# Altium PCB JUNORPCDC.PcbDoc (part 4 of 4)
Units mil, origin at the board's own origin, x right, y up, seen from the top; angles counter-clockwise.
Board outline 12224.75 x 6712.94 mil, 12 copper layers (Top Layer, Internal Plane 1, Signal Layer 1, Internal Plane 2, Internal Plane 3, Signal Layer 2, Internal Plane 4, Signal Layer 3, Internal Plane 5, Signal Layer 4, Internal Plane 6, Bottom Layer), stack 101.97 mil thick; 156 components, 400 nets, 1963 pads, 846 vias.
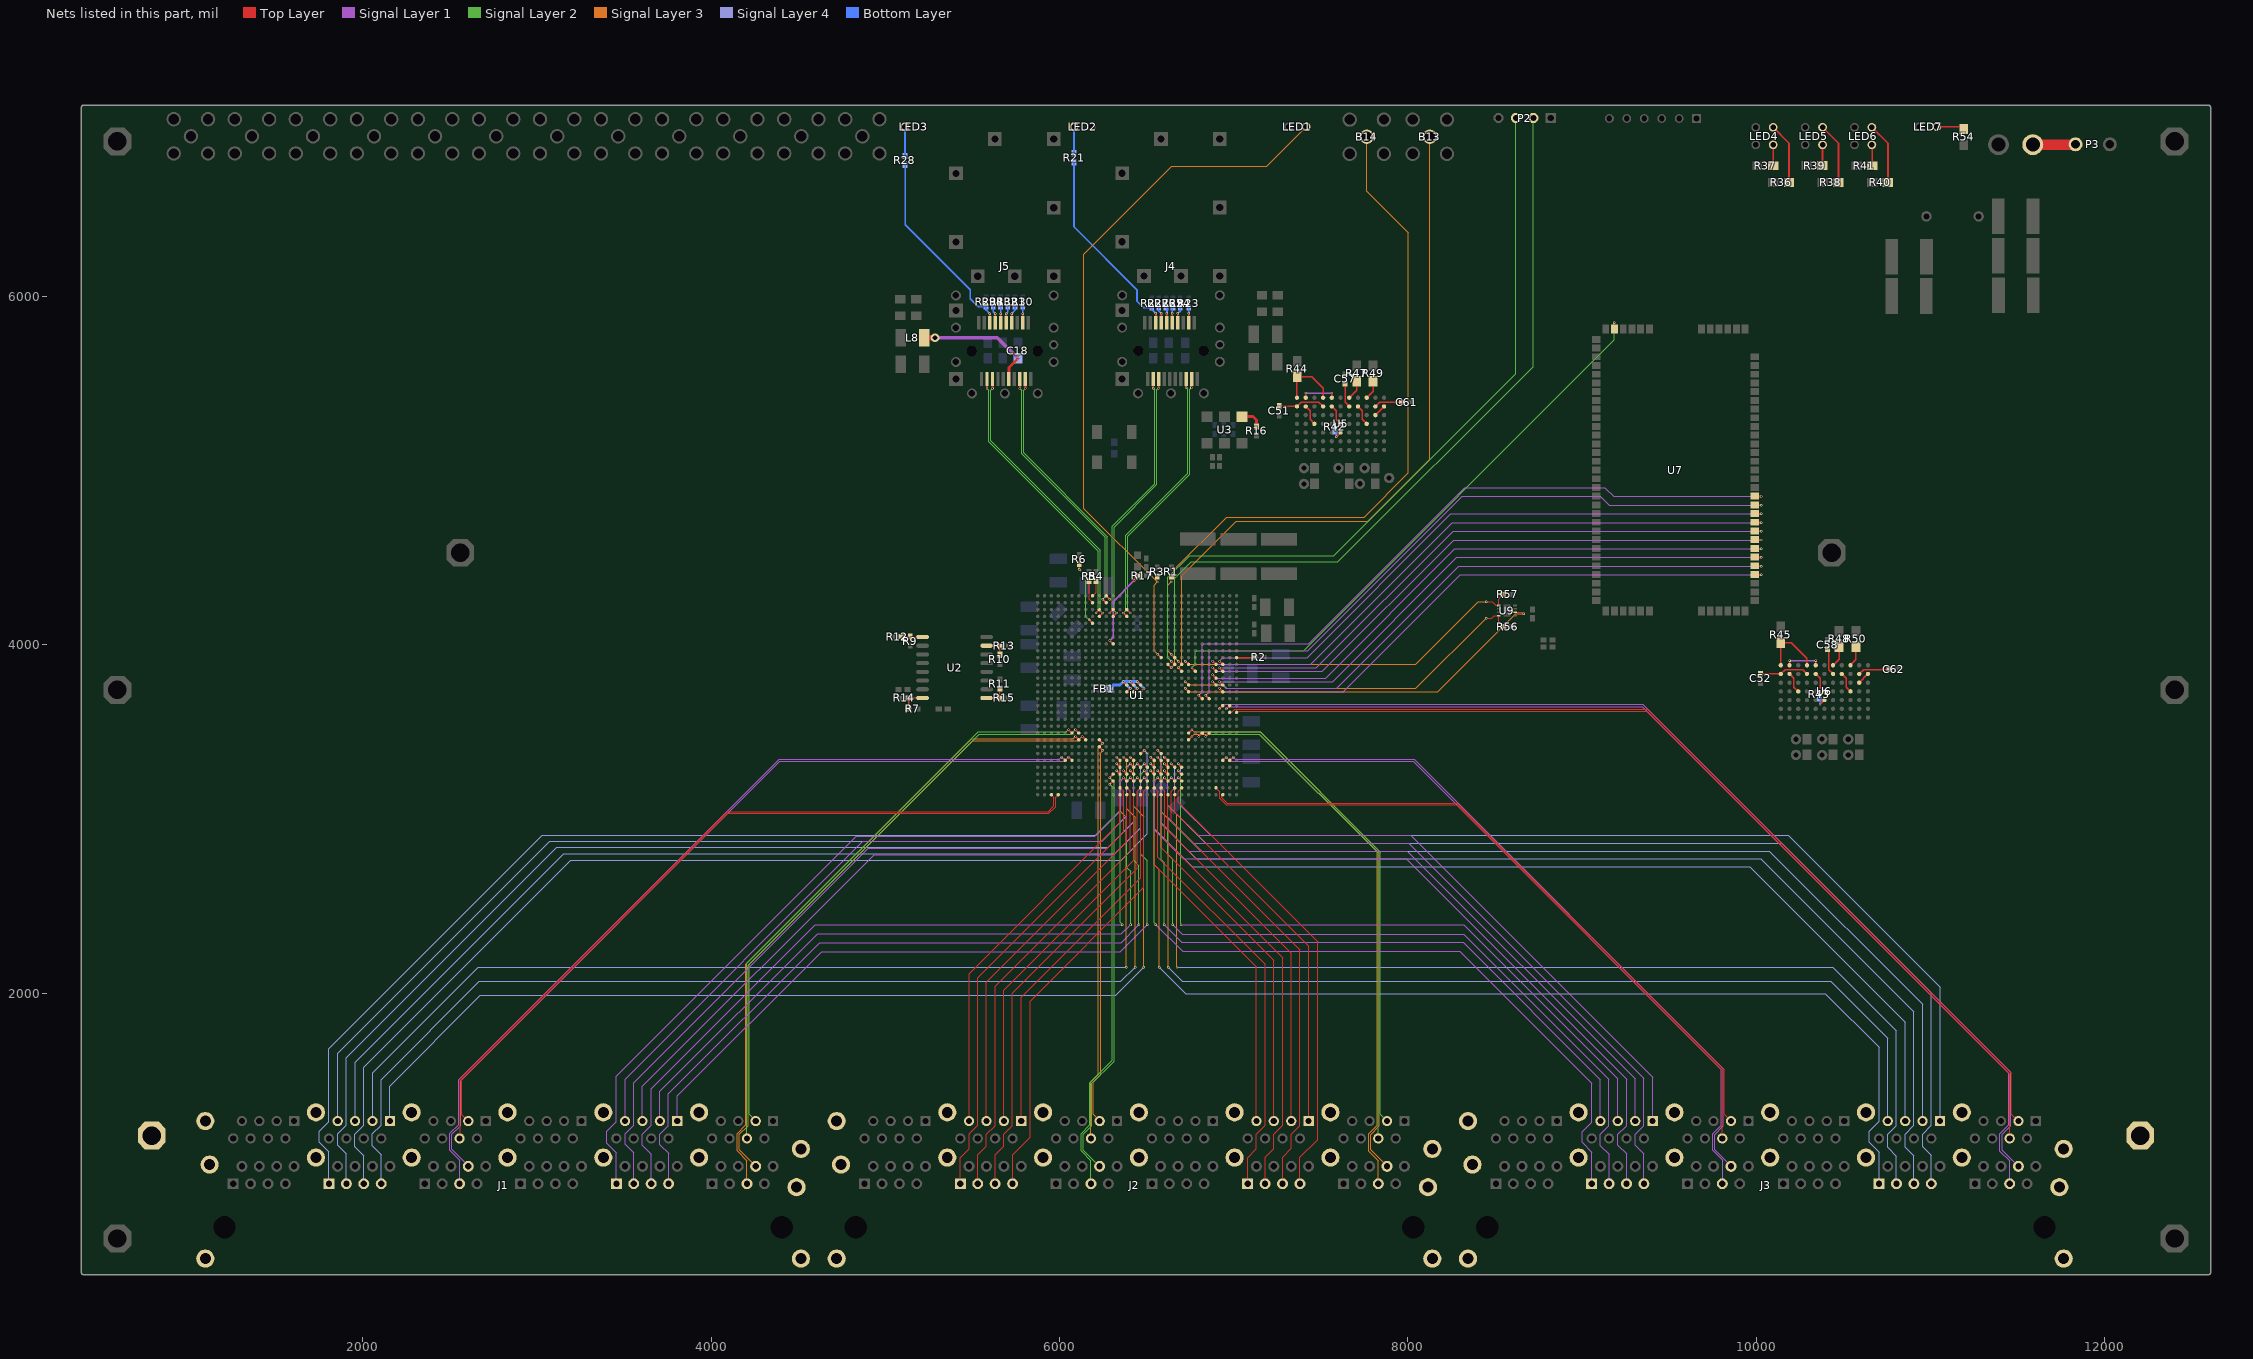
[diagram p14: the nets of this part, all layers, seen from the top]

## Via types
v1: diameter 14, hole 8, Top Layer to Bottom Layer, 811 vias
v2: diameter 50, hole 28, Top Layer to Bottom Layer, 26 vias
v3: diameter 20, hole 10, Top Layer to Bottom Layer, 9 vias

## Nets (pads, with @x,y where several pads share a name; then routed paths per layer and width w, separated by ;. In a path a pad name is that pad's centre, name@x,y a point inside that pad or via, vN(x,y) a via of type N, cw(c..) or ccw(c..) an arc to the next point about the centre after c; other vN are vias at no path point) (continued)
NetC18_2: C18.2 J5.16 L8.2 | length 728.5
  Top Layer w10: J5.16@5709,5525.18 J5.16@5709.13,5525.05
  Top Layer w16: J5.16@5709.13,5525.05 5709.13,5592.13 v1(5761,5644)
  Top Layer w30: L8.2@5222,5762 v2(5285,5762)
  Signal Layer 1 w20: v2(5285,5762) 5643,5762 v1(5761,5644)
NetC51_2: C51.2 U5.A6 U5.D6 | length 273
  Top Layer w8: C51.2@7261,5368.59 7314.41,5368.59 7315,5368 U5.A6@7363,5368 7388,5393 7488,5393 U5.D6@7513,5368
NetC52_2: C52.2 U6.A6 U6.D6 | length 287
  Top Layer w8: C52.2@10025,3832.59 10025.59,3832 U6.A6@10141,3832 10166,3857 10266,3857 U6.D6@10291,3832
NetC57_2: C57.2 U5.G6 | length 127.4
  Top Layer w8: C57.2@7639,5485.41 7639,5392 U5.G6@7663,5368
NetC58_2: C58.2 U6.G6 | length 156.7
  Top Layer w8: C58.2@10409,3975.41 10416,3968.41 10416,3857 U6.G6@10441,3832
NetC61_2: C61.2 U5.K6 | length 147.8
  Top Layer w8: U5.K6@7813,5368 7838,5393 C61.2@7950.41,5393
NetC62_2: C62.2 U6.K6 | length 185
  Top Layer w8: U6.K6@10591,3832 10616,3857 10761.41,3857 C62.2@10764.41,3860
NetFB1_2: FB1.2 U1.R14 U1.R15 U1.T14 U1.T15 U1.U14 U1.U15 | length 511.4
  Top Layer w8: v1(6365.93,3788) 6385.26,3768.67 U1.U14@6386.01,3768.67 U1.U14@6386.67,3768.67 ; U1.U15@6386.01,3729.3 6386.3,3729.3 v1(6406,3749) ; v1(6405.75,3788) 6425.08,3768.67 U1.T14@6425.38,3768.67 ; U1.T15@6425.38,3729.3 6425.5,3729.3 v1(6445.2,3749) ; v1(6445,3787.81) 6445.61,3787.81 U1.R14@6464.75,3768.67 U1.R14@6465.24,3768.67 ; U1.R15@6464.75,3729.3 6484.45,3749 v1(6484.57,3749)
  Bottom Layer w16: FB1.2@6286.46,3748 6306.46,3768 6346,3768 6346,3768.07 v1(6365.93,3788) ; v1(6406,3749) 6404.93,3749 v1(6365.93,3788) ; v1(6445.2,3749) 6444.75,3749 v1(6405.75,3788) ; v1(6484.57,3749) 6483.81,3749 v1(6445,3787.81) 6444.81,3788 v1(6405.75,3788) ; v1(6365.93,3788) v1(6405.75,3788)
NetJ4_2: J4.2 R23.2 | length 86.9
  Top Layer w10: J4.2@6741.85,5848.58 6741.85,5901.85 v1(6742,5902)
  Bottom Layer w10: v1(6742,5902) R23.2@6742,5935.41
NetJ4_4: J4.4 R24.2 | length 92.4
  Top Layer w10: J4.4@6678.86,5848.58 6678.86,5901.86 v1(6679,5902)
  Bottom Layer w10: v1(6679,5902) 6692.2,5915.2 R24.2@6692.2,5935.41
NetJ4_5: J4.5 R25.2 | length 88.7
  Top Layer w10: v1(6647.17,5902) 6647.36,5901.8 J4.5@6647.36,5848.58
  Bottom Layer w10: v1(6647.17,5902) 6647.17,5931.17 R25.2@6651.4,5935.41
NetJ4_6: J4.6 R26.2 | length 89.1
  Top Layer w10: J4.6@6615.87,5848.58 6615.87,5901.87 v1(6616,5902)
  Bottom Layer w10: R26.2@6610.6,5935.41 6616,5930.01 v1(6616,5902)
NetJ4_7: J4.7 R27.2 | length 92.9
  Top Layer w10: v1(6584,5902) 6584.37,5901.63 J4.7@6584.37,5848.58
  Bottom Layer w10: R27.2@6569.8,5935.41 6569.8,5916.2 v1(6584,5902)
NetJ4_8: J4.8 R21.1 R22.2 | length 1144.3
  Top Layer w10: J4.8@6552.87,5848.58 6552.87,5901.87 v1(6553,5902)
  Bottom Layer w10: R21.1@6083,6770.41 6083,6399 6444,6038 6444,5973 6481.59,5935.41 R22.2@6529,5935.41 6529,5926 v1(6553,5902)
NetJ5_2: J5.2 R30.2 | length 94.6
  Top Layer w10: J5.2@5787.87,5847.88 v1(5787.87,5901)
  Bottom Layer w10: v1(5787.87,5901) 5787.87,5942.28 R30.2@5788,5942.41
NetJ5_4: J5.4 R31.2 | length 102.4
  Top Layer w10: J5.4@5724.88,5847.88 5724.88,5900.88 v1(5725,5901)
  Bottom Layer w10: v1(5725,5901) 5744,5920 R31.2@5744,5942.41
NetJ5_5: J5.5 R32.2 | length 98.3
  Top Layer w10: J5.5@5693.39,5847.88 v1(5693.39,5901)
  Bottom Layer w10: v1(5693.39,5901) 5702.5,5910.11 R32.2@5702.5,5942.41
NetJ5_6: J5.6 R33.2 | length 94.9
  Top Layer w10: J5.6@5661.89,5847.88 v1(5661.89,5901)
  Bottom Layer w10: R33.2@5661,5942.41 5661.89,5941.52 v1(5661.89,5901)
NetJ5_7: J5.7 R34.2 | length 99
  Top Layer w10: J5.7@5630.39,5847.88 v1(5630.39,5901)
  Bottom Layer w10: R34.2@5619.5,5942.41 5619.5,5911.89 v1(5630.39,5901)
NetJ5_8: J5.8 R28.1 R29.2 | length 1136.2
  Top Layer w10: J5.8@5598.9,5847.88 5598.9,5900.9 v1(5599,5901)
  Bottom Layer w10: R28.1@5114,6755.41 5114,6412 5487,6039 5487,5986 5530.59,5942.41 R29.2@5578,5942.41 5578,5922 v1(5599,5901)
NetLED1_1: LED1.1 R3.1 U1.M10 | length 4125.8
  Top Layer w4: v1(6561.14,4360) R3.1@6561.14,4392.41
  Top Layer w8: v1(6563,3946) U1.M10@6582.86,3926.15
  Signal Layer 3 w4: v1(6563,3946) 6543,3966 6543,4341.86 v1(6561.14,4360) 6140,4781.14 6140,6243 6643,6746 7188,6746 LED1.1@7415.5,6973.5
NetLED2_2: LED2.2 R21.2 | length 152.4
  Bottom Layer w10: R21.2@6083,6821.59 LED2.2@6083,6974
NetLED3_2: LED3.2 R28.2 | length 166.4
  Bottom Layer w10: R28.2@5112,6806.59 LED3.2@5112,6973
NetLED4_1: LED4.1 R37.1 | length 120
  Top Layer w10: R37.1@10097,6750 LED4.1@10097,6870
NetLED4_3: LED4.3 R36.1 | length 353.7
  Top Layer w10: LED4.3@10097,6970 10188,6879 R36.1@10188,6654
NetLED5_1: LED5.1 R39.1 | length 119.2
  Top Layer w10: R39.1@10380,6751 10380,6869.5 LED5.1@10380.5,6870
NetLED5_3: LED5.3 R38.1 | length 353.9
  Top Layer w10: LED5.3@10380.5,6970 10472,6878.5 R38.1@10472,6654
NetLED6_1: LED6.1 R41.1 | length 120.8
  Top Layer w10: LED6.1@10664,6870 10666,6868 R41.1@10666,6750
NetLED6_3: LED6.3 R40.1 | length 354.1
  Top Layer w10: LED6.3@10664,6970 10756,6878 R40.1@10756,6654
NetLED7_1: LED7.1 R54.2 | length 160.4
  Top Layer w10: LED7.1@11037,6974 11179,6974 R54.2@11192,6961
NetR1_1: R1.1 U1.K10 | length 490.9
  Top Layer w4: v1(6642,4360) R1.1@6642,4392.41
  Top Layer w8: v1(6642,3946) 6661.6,3926.4 U1.K10@6661.6,3926.15
  Signal Layer 3 w4: v1(6642,3946) 6622,3966 6622,4340 v1(6642,4360)
NetR2_1: R2.1 U1.A10 | length 103.7
  Top Layer w8: U1.A10@7015.93,3926.59 U1.A10@7015.93,3926.15 7116.56,3926.15 R2.1@7118.41,3928
NetR4_1: R4.1 U1.AB1 | length 94.1
  Top Layer w4: U1.AB1@6189.16,4280.48 6209,4300.32 R4.1@6209,4366.41
NetR5_1: R5.1 U1.AB2 | length 133.6
  Top Layer w4: R5.1@6169,4366.41 6169,4261.27 U1.AB2@6189.16,4241.11
NetR6_1: R6.1 U1.AB5 | length 373.2
  Top Layer w8: v1(6169,4142) 6188,4123 U1.AB5@6189.16,4123
  Top Layer w10: v1(6113,4434) R6.1@6113,4464
  Signal Layer 2 w4: v1(6113,4434) 6150,4397 6150,4161 v1(6169,4142)
NetR7_1: R7.1 R14.1 U2.8 | length 143.6
  Top Layer w8: R7.1@5132.41,3631 5132.59,3631.18 R14.1@5132.59,3694 U2.8@5213.13,3694
NetR9_1: R9.1 R12.1 U2.1 | length 121.4
  Top Layer w8: R12.1@5093,4047 5093.41,4046.59 R9.1@5143,4046.59 5145.59,4044 U2.1@5213.13,4044
NetR10_1: R10.1 R13.2 U2.15 | length 128.3
  Top Layer w8: U2.15@5581.24,3994 R13.2@5657.41,3994 5657.41,3942.41 R10.1@5657,3942
NetR11_1: R11.1 R15.2 U2.9 | length 130.8
  Top Layer w8: U2.9@5581.24,3694 R15.2@5656.41,3694 5656.41,3748.82 R11.1@5657,3749.41
NetR16_1: R16.1 U3.1 | length 127.9
  Top Layer w16: U3.1@7047,5309.54 7110.46,5309.54 7131,5289 R16.1@7131,5253.59
NetR17_2: R17.2 U1.W8 | length 467.5
  Top Layer w8: v1(6287.78,4024) 6288.16,4024 U1.W8@6307.27,4004.89
  Top Layer w20: v1(6429,4369) 6429,4376.18 R17.2@6449.82,4397
  Signal Layer 1 w8: v1(6287.78,4024) 6307,4043.22 6307,4247 v1(6429,4369)
NetR42_2: R42.2 U5.F3 | length 70.7
  Top Layer w8: v1(7588,5193) U5.F3@7613,5218
  Bottom Layer w8: R42.2@7581,5225.41 7588,5218.41 v1(7588,5193)
NetR43_2: R43.2 U6.F3 | length 70.4
  Top Layer w8: v1(10366,3657) U6.F3@10391,3682
  Bottom Layer w8: R43.2@10362,3690.41 10366,3686.41 v1(10366,3657)
NetR44_2: R44.2 U5.A7 U5.D7 | length 350.5
  Top Layer w8: U5.A7@7363,5418 7363,5537 7449,5537 7513,5473 U5.D7@7513,5418
NetR45_2: R45.2 U6.A7 U6.D7 | length 357.9
  Top Layer w8: U6.A7@10141,3882 R45.2@10141,4012 10202,4012 10291,3923 U6.D7@10291,3882
NetR47_2: R47.2 U5.G7 | length 112.8
  Top Layer w8: U5.G7@7663,5418 7706,5461 R47.2@7706,5513
NetR48_2: R48.2 U6.G7 | length 120.1
  Top Layer w8: U6.G7@10441,3882 10475,3916 R48.2@10475,3988
NetR49_2: R49.2 U5.J7 | length 110.3
  Top Layer w8: U5.J7@7763,5418 7800,5455 R49.2@7800,5513
NetR50_2: R50.2 U6.J7 | length 118.8
  Top Layer w8: U6.J7@10541,3882 10572,3913 R50.2@10572,3988
NetU5_b6: U5.B6 U5.C4 | length 120.7
  Top Layer w8: U5.B6@7413,5368 7438,5343 7438,5293 U5.C4@7463,5268
NetU5_b7: U5.B7 U5.E7 | length 204
  Top Layer w8: U5.B7@7413,5418 v1(7413,5445) ; U5.E7@7563,5418 v1(7563,5445)
  Signal Layer 1 w8: v1(7413,5445) v1(7563,5445)
NetU5_e6: U5.E6 U5.F4 | length 120.7
  Top Layer w8: U5.E6@7563,5368 7588,5343 7588,5293 U5.F4@7613,5268
NetU5_h6: U5.H6 U5.J4 | length 120.7
  Top Layer w8: U5.H6@7713,5368 7738,5343 7738,5293 U5.J4@7763,5268
NetU5_k5: U5.K5 U5.L6 | length 70.7
  Top Layer w8: U5.K5@7813,5318 U5.L6@7863,5368
NetU6_b6: U6.B6 U6.C4 | length 120.7
  Top Layer w8: U6.B6@10191,3832 10216,3807 10216,3757 U6.C4@10241,3732
NetU6_b7: U6.B7 U6.E7 | length 204
  Top Layer w8: U6.B7@10191,3882 v1(10191,3909) ; U6.E7@10341,3882 v1(10341,3909)
  Signal Layer 1 w8: v1(10191,3909) v1(10341,3909)
NetU6_e6: U6.E6 U6.F4 | length 120.7
  Top Layer w8: U6.E6@10341,3832 10366,3807 10366,3757 U6.F4@10391,3732
NetU6_h6: U6.H6 U6.J4 | length 120.7
  Top Layer w8: U6.H6@10491,3832 10516,3807 10516,3757 U6.J4@10541,3732
NetU6_k5: U6.K5 U6.L6 | length 70.7
  Top Layer w8: U6.K5@10591,3782 U6.L6@10641,3832
nRESET_LVCMOS33: U1.H15 U9.6 | length 2222.1
  Top Layer w4: U9.6@8614.26,4186.16 8657.18,4186.16 v1(8666,4177.33)
  Top Layer w8: v1(6721,3749) 6721,3748.64 U1.H15@6740.34,3729.3
  Signal Layer 3 w4: v1(6721,3749) 6741,3729 8170,3729 8618.33,4177.33 v1(8666,4177.33)
ONE_WIRE_LVCMOS33: U1.G12 U7.C12 | length 3408.7
  Top Layer w8: v1(6760,3867) 6779.59,3847.41 U1.G12@6779.71,3847.41
  Top Layer w10: v1(9185,5848) 9185,5813.65 U7.C12@9186,5812.65
  Signal Layer 2 w4: v1(6760,3867) 6780,3887 6780,3959 6787,3966 7401,3966 9185,5750 v1(9185,5848)
PGND: J1.MH1 J1.MH2 J1.MH3 J1.MH4 J1.MH5 J1.MH6 J1.MH7 J1.MH8 J1.MH9 J1.MH10 J1.MH11 J1.MH12 J1.MH13 J1.MH14 J1.MH15 J1.MH16 J2.MH1 J2.MH2 J2.MH3 J2.MH4 J2.MH5 J2.MH6 J2.MH7 J2.MH8 J2.MH9 J2.MH10 J2.MH11 J2.MH12 J2.MH13 J2.MH14 J2.MH15 J2.MH16 J3.MH1 J3.MH2 J3.MH3 J3.MH4 J3.MH5 J3.MH6 J3.MH7 J3.MH8 J3.MH9 J3.MH10 J3.MH11 J3.MH12 J3.MH13 J3.MH14 J3.MH15 J3.MH16 pad.0@787.4,1181.1 pad.0@12204.72,1181.1
PLL_CS_LVCMOS33: U1.D12 U7.B8 | length 3537.7
  Top Layer w8: v1(6878,3867) 6878.23,3867 U1.D12@6897.82,3847.41
  Top Layer w10: U7.B8@9991.71,4603 9993.71,4601 v1(10029,4601)
  Signal Layer 1 w4: v1(6878,3867) 6898,3847 7508,3847 8262,4601 v1(10029,4601)
PLL_LOCK_LVCMOS33: U1.C15 U7.B4 | length 3463.4
  Top Layer w8: v1(6918,3749) 6937.19,3729.81 U1.C15@6937.19,3729.3
  Top Layer w10: U7.B4@9991.71,4403 9993.71,4401 v1(10029,4401)
  Signal Layer 1 w4: v1(6918,3749) 6938,3729 7628,3729 8300,4401 v1(10029,4401)
PLL_REFMON_LVCMOS33: U1.F16 U7.B13 | length 3965.8
  Top Layer w8: v1(6799,3710) U1.F16@6819.08,3689.93
  Top Layer w10: U7.B13@9991.71,4853 9993.71,4851 v1(10029,4851)
  Signal Layer 1 w4: v1(6799,3710) 6819,3730 6819,3995 6829,4005 7430,4005 8326,4901 9131,4901 9181,4851 v1(10029,4851)
PLL_REFSEL_LVCMOS33: U1.E16 U7.B12 | length 3885.4
  Top Layer w8: v1(6839,3710) 6839,3709.38 U1.E16@6858.45,3689.93
  Top Layer w10: U7.B12@9991.71,4803 9993.71,4801 v1(10029,4801)
  Signal Layer 1 w4: v1(6839,3710) 6858,3729 6858,3958 6866,3966 7426,3966 8313,4853 9103,4853 9155,4801 v1(10029,4801)
PLL_RESET_LVCMOS33: U1.C11 U7.B11 | length 3526.3
  Top Layer w8: v1(6918,3906) U1.C11@6937.19,3886.78
  Top Layer w10: U7.B11@9991.71,4753 9993.71,4751 v1(10029,4751)
  Signal Layer 1 w4: v1(6918,3906) 6938,3926 7422,3926 8247,4751 v1(10029,4751)
PLL_SCLK_LVCMOS33: U1.D13 U7.B7 | length 3533.3
  Top Layer w8: v1(6878,3828) 6897.82,3808.18 U1.D13@6897.82,3808.04
  Top Layer w10: U7.B7@9991.71,4553 9993.71,4551 v1(10029,4551)
  Signal Layer 1 w4: v1(6878,3828) 6898,3808 7527,3808 8270,4551 v1(10029,4551)
PLL_SDI_LVCMOS33: U1.D11 U7.B10 | length 3561.9
  Top Layer w8: v1(6878,3906) 6897.22,3886.78 U1.D11@6897.82,3886.78
  Top Layer w10: U7.B10@9991.71,4703 9993.71,4701 v1(10029,4701)
  Signal Layer 1 w4: v1(6878,3906) 6897,3887 7441,3887 8255,4701 v1(10029,4701)
PLL_SDO_LVCMOS33: U1.C12 U7.B9 | length 3501.4
  Top Layer w8: v1(6918,3867) 6918,3866.6 U1.C12@6937.19,3847.41
  Top Layer w10: U7.B9@9991.71,4653 9993.71,4651 v1(10029,4651)
  Signal Layer 1 w4: v1(6918,3867) 7475,3867 8259,4651 v1(10029,4651)
PLL_STAT_LVCMOS33: U1.D14 U7.B5 | length 3523.9
  Top Layer w8: v1(6878,3788) 6878.49,3788 U1.D14@6897.82,3768.67
  Top Layer w10: U7.B5@9991.71,4453 9993.71,4451 v1(10029,4451)
  Signal Layer 1 w4: v1(6878,3788) 6897.33,3768.67 6936,3768.67 6955.67,3749 7590,3749 8292,4451 v1(10029,4451)
PLL_SYNC_LVCMOS33: U1.C14 U7.B6 | length 3471.7
  Top Layer w8: v1(6918,3788) 6937.19,3768.81 U1.C14@6937.19,3768.67
  Top Layer w10: U7.B6@9991.71,4503 9993.71,4501 v1(10029,4501)
  Signal Layer 1 w4: v1(6918,3788) 7568,3788 8281,4501 v1(10029,4501)
Powerin: P3.1 pad.2 | length 246.1
  Top Layer w30: P3.1@11831.15,6871 P3.1@11833.15,6873
  Top Layer w60: pad.2@11587.85,6871 P3.1@11831.15,6871
RESET1_LVDS25_N: J1.C4 U1.AH30 | length 4472.9
  Top Layer w4: J1.C4@2555,1165 2558,1168 2558,1508.14 4090.86,3041 5933.62,3041 5967.62,3075 5967.62,3124.06 U1.AH30@5952.94,3138.75
RESET1_LVDS25_P: J1.C3 U1.AG30 | length 4386.9
  Top Layer w4: J1.C3@2605,1265 2568,1302 2568,1504 4095,3031 5937.76,3031 5977.62,3070.86 5977.62,3124.06 U1.AG30@5992.31,3138.75
RESET2_LVDS25_N: J1.F4 U1.AE21 | length 3435.6
  Top Layer w8: v1(6051,3513) 6070.92,3493.08 U1.AE21@6071.05,3493.08
  Signal Layer 2 w4: J1.F4@4205,1165 4205,2169.97 5534.03,3499 6037,3499 v1(6051,3513)
RESET2_LVDS25_P: J1.F3 U1.AD21 | length 3376.1
  Top Layer w8: v1(6091,3513) 6110.42,3493.58 U1.AD21@6110.42,3493.08
  Signal Layer 2 w4: J1.F3@4255,1265 4217,1303 4217,2165 5539,3487 6065,3487 v1(6091,3513)
RESET3_LVDS25_N: J1.I5 U1.AF25 | length 4899.1
  Top Layer w8: v1@6012.28,3355 U1.AF25@6031.68,3335.6
  Top Layer w10: v1(6012,3355) v1@6012.28,3355
  Signal Layer 1 w4: J1.I5@2555,905 2555,1041.03 2502.51,1093.51 2499,1097.03 2499,1193 2502.51,1196.51 2549,1243 2549,1501.97 4389.03,3342 5999,3342 v1(6012,3355)
RESET3_LVDS25_P: J1.I6 U1.AE25 | length 4839.3
  Top Layer w8: v1@6051.65,3355 U1.AE25@6071.05,3335.6
  Top Layer w10: v1(6051,3355) v1@6051.65,3355
  Signal Layer 1 w4: J1.I6@2605,1005 2605,1008 2538,1075 2511,1102 2511,1188.03 2561,1238.03 2561,1497 4394,3330 6026,3330 v1(6051,3355)
RESET4_LVDS25_N: J1.L5 U1.AD22 | length 3764.5
  Top Layer w8: v1@6091.13,3473 U1.AD22@6110.42,3453.71
  Top Layer w10: v1(6091,3473) v1@6091.13,3473
  Signal Layer 3 w4: J1.L5@4205,905 4205,1038.03 4149,1094.03 4149,1193 4199,1243 4199,2163.97 5495.03,3460 6078,3460 v1(6091,3473)
RESET4_LVDS25_P: J1.L6 U1.AC22 | length 3704.7
  Top Layer w8: v1(6130,3473) U1.AC22@6149.29,3453.71
  Top Layer w10: U1.AC22@6149.29,3453.71 U1.AC22@6149.79,3453.71
  Signal Layer 3 w4: J1.L6@4255,1005 4161,1099 4161,1188.03 4211,1238.03 4211,2159 5500,3448 6105,3448 v1(6130,3473)
RESET5_LVDS25_N: J2.C4 U1.AA22 | length 2324.9
  Top Layer w8: U1.AA22@6228.53,3453.47 v1(6248,3434)
  Top Layer w10: U1.AA22@6228.53,3453.47 U1.AA22@6228.53,3453.71
  Signal Layer 3 w4: J2.C4@6180,1165 6180,1492 6223,1535 6223,3409 v1(6248,3434)
RESET5_LVDS25_P: J2.C3 U1.AA23 | length 2196.3
  Top Layer w8: U1.AA23@6228.53,3414.34 v1@6248,3394.87
  Top Layer w10: v1(6248,3394) v1@6248,3394.87
  Signal Layer 3 w4: J2.C3@6230,1265 6192,1303 6192,1487.03 6235,1530.03 6235,3381 v1(6248,3394)
RESET6_LVDS25_N: J2.F4 U1.E21 | length 2946.8
  Top Layer w8: v1(6839,3473) 6839,3473.63 U1.E21@6858.45,3493.08
  Signal Layer 2 w4: v1(6839,3473) 6853,3487 7147,3487 7830,2804 J2.F4@7830,1165
RESET6_LVDS25_P: J2.F3 U1.F21 | length 2927.7
  Top Layer w8: v1(6799,3473) U1.F21@6819.08,3493.08
  Signal Layer 2 w4: v1(6799,3473) 6825,3499 7151.97,3499 7842,2808.97 7842,1303 J2.F3@7880,1265
RESET7_LVDS25_N: J2.I5 U1.W28 | length 2423.7
  Top Layer w8: v1@6287.78,3198 U1.W28@6307.27,3217.49
  Top Layer w10: v1(6287,3198) v1@6287.78,3198
  Signal Layer 2 w4: J2.I5@6180,905 6180,1037.03 6124,1093.03 6124,1193 6174,1243 6174,1486 6301,1613 6301,3184 v1(6287,3198)
RESET7_LVDS25_P: J2.I6 U1.W27 | length 2384.1
  Top Layer w8: v1@6287.41,3237 U1.W27@6307.27,3256.86
  Top Layer w10: v1(6287,3237) v1@6287.41,3237
  Signal Layer 2 w4: J2.I6@6230,1005 6229,1005 6136,1098 6136,1188.03 6186,1238.03 6186,1481.03 6313,1608.03 6313,3211 v1(6287,3237)
RESET8_LVDS25_N: J2.L5 U1.H22 | length 3326.8
  Top Layer w8: U1.H22@6740.71,3453.71 v1(6760,3473)
  Top Layer w10: U1.H22@6740.34,3453.71 U1.H22@6740.71,3453.71
  Signal Layer 3 w4: v1(6760,3473) 6774,3487 7147,3487 7824,2810 7824,1242 7774,1192 7774,1092 7830,1036 J2.L5@7830,905
RESET8_LVDS25_P: J2.L6 U1.H21 | length 3262.8
  Top Layer w8: U1.H21@6740.34,3493.08 6760,3512.74 v1(6760,3513)
  Signal Layer 3 w4: v1(6760,3513) 6774,3499 7151.97,3499 7836,2814.97 7836,1237.03 7786,1187.03 7786,1099 J2.L6@7880,1005
RESET9_LVDS25_N: J3.C4 U1.D29 | length 3991.7
  Top Layer w4: U1.D29@6897.82,3178.12 6920,3155.94 6920,3117.86 6954.93,3082.93 6957.86,3080 8279.86,3080 9805,1554.86 J3.C4@9805,1165
RESET9_LVDS25_P: J3.C3 U1.C30 | length 3861.1
  Top Layer w4: U1.C30@6937.19,3138.75 6932,3133.56 6932,3120 6962,3090 8284,3090 9815,1559 9815,1305 J3.C3@9855,1265
RESET10_LVDS25_N: J3.F4 U1.A18 | length 5674.9
  Top Layer w4: U1.A18@7015.93,3611.19 7023.74,3619 9370,3619 11455,1534 J3.F4@11455,1165
RESET10_LVDS25_P: J3.F3 U1.B18 | length 5651.6
  Top Layer w4: U1.B18@6976.56,3611.19 6988.4,3611.19 7006.21,3629 9374.14,3629 11465,1538.14 11465,1305 J3.F3@11505,1265
RESET11_LVDS25_N: J3.I5 U1.C25 | length 4314.1
  Top Layer w8: U1.C25@6937.6,3335.6 v1(6957,3355)
  Top Layer w10: U1.C25@6937.19,3335.6 U1.C25@6937.6,3335.6
  Signal Layer 1 w4: v1(6957,3355) 6982,3330 8030,3330 9799,1561 9799,1242 9749,1192 9749,1096.03 9806.51,1038.51 9806.51,906.51 J3.I5@9805,905
RESET11_LVDS25_P: J3.I6 U1.B25 | length 4204.1
  Top Layer w8: U1.B25@6976.56,3335.6 v1(6996,3355)
  Signal Layer 1 w4: v1(6996,3355) 7009,3342 8034.97,3342 9811,1565.97 9811,1237.03 9761,1187.03 9761,1101 9815,1047 9855,1007 J3.I6@9855,1005
RESET12_LVDS25_N: J3.L5 U1.B17 | length 6076.3
  Top Layer w8: v1(6957,3631) U1.B17@6976.56,3650.56
  Signal Layer 1 w4: v1(6957,3631) 6971,3645 9344,3645 11449,1540 11449,1243 11399,1193 11399,1092.03 11455,1036.03 J3.L5@11455,905
RESET12_LVDS25_P: J3.L6 U1.C17 | length 6058.7
  Top Layer w8: v1(6917,3631) 6936.56,3650.56 U1.C17@6937.19,3650.56
  Signal Layer 1 w4: v1(6917,3631) 6943,3657 9348.97,3657 11461,1544.97 11461,1238.03 11411,1188.03 11411,1097 11503,1005 J3.L6@11505,1005
SCL_LVCMOS33: R56.2 U1.H14 U9.4 | length 2090.4
  Top Layer w4: v1(8449,4152) 8480.33,4152 8494.81,4166.47 U9.4@8521.74,4166.47 8521.74,4130.08 R56.2@8547.82,4104
  Top Layer w8: v1(6721,3788) U1.H14@6740.34,3768.67
  Signal Layer 3 w4: v1(6721,3788) 6740.33,3768.67 6936.33,3768.67 6956,3749 8046,3749 v1(8449,4152)
SDA_LVCMOS33: R57.2 U1.H11 U9.1 | length 2066.8
  Top Layer w4: v1(8449,4246) 8484,4246 8504.47,4225.53 U9.1@8521.74,4225.53 8521.74,4264.33 R57.2@8546.41,4289
  Top Layer w8: v1(6721,3906) 6721.12,3906 U1.H11@6740.34,3886.78
  Signal Layer 3 w4: v1(6721,3906) 6740,3887 8044,3887 8403,4246 v1(8449,4246)
SFP1RX_N: J4.12 U1.W3 | length 1483.7
  Top Layer w8: v1(6287,4182) 6287.53,4182 U1.W3@6307.27,4201.74
  Top Layer w10: v1(6537,5472) 6537.13,5472.13 J4.12@6537.13,5525.75
  Signal Layer 2 w4: v1(6287,4182) 6301,4196 6301,4680 6546.5,4925.5 6546.5,5462.5 v1(6537,5472)
SFP1RX_P: J4.13 U1.W4 | length 1483.3
  Top Layer w8: U1.W4@6307.27,4162.37 6307.37,4162.37 v1(6327,4182)
  Top Layer w10: v1(6568,5472) 6568.62,5472.62 J4.13@6568.62,5525.75
  Signal Layer 2 w4: v1(6327,4182) 6313,4196 6313,4675.03 6558.5,4920.53 6558.5,5462.5 v1(6568,5472)
SFP1TX_N: J4.19 U1.U3 | length 1529.2
  Top Layer w8: U1.U3@6386.01,4201.74 6405.75,4182 v1(6406,4182)
  Top Layer w10: v1(6757,5475) 6757.6,5475.6 J4.19@6757.6,5525.75
  Signal Layer 2 w4: v1(6406,4182) 6392,4196 6392,4624.03 6747.5,4979.53 6747.5,5465.5 v1(6757,5475)
SFP1TX_P: J4.18 U1.U4 | length 1528.9
  Top Layer w8: v1(6366,4182) 6366.38,4182 U1.U4@6386.01,4162.37
  Top Layer w10: v1(6726,5475) 6726.1,5475.1 J4.18@6726.1,5525.75
  Signal Layer 2 w4: v1(6366,4182) 6380,4196 6380,4629 6735.5,4984.5 6735.5,5465.5 v1(6726,5475)
SFP2RX_N: J5.12 U1.AA3 | length 1641
  Top Layer w8: v1(6209,4182) 6228.53,4201.53 U1.AA3@6228.53,4201.74
  Top Layer w10: v1(5583,5471) 5583.15,5471.15 J5.12@5583.15,5525.05
  Signal Layer 2 w4: v1(5583,5471) 5593,5461 5593,5165.03 6222,4536.03 6222,4195 v1(6209,4182)
SFP2RX_P: J5.13 U1.AA4 | length 1641.4
  Top Layer w8: U1.AA4@6228.53,4162.37 6248,4181.84 v1(6248,4182)
  Top Layer w10: J5.13@5614.65,5525.05 5615,5524.69 v1(5615,5471)
  Signal Layer 2 w4: v1(5615,5471) 5605,5461 5605,5170 6234,4541 6234,4196 v1(6248,4182)
SFP2TX_N: J5.19 U1.Y1 | length 1500
  Top Layer w8: U1.Y1@6267.9,4280.48 6287,4261.38 v1(6287,4261)
  Top Layer w10: v1(5803,5471) 5803.62,5471.62 J5.19@5803.62,5525.05
  Signal Layer 2 w4: v1(5803,5471) 5793.5,5461.5 5793.5,5101.5 6274,4621 6274,4274 v1(6287,4261)
SFP2TX_P: J5.18 U1.Y2 | length 1501
  Top Layer w8: v1(6248,4261) U1.Y2@6267.9,4241.11
  Top Layer w10: v1(5772,5471) 5772.13,5471.13 J5.18@5772.13,5525.05
  Signal Layer 2 w4: v1(5772,5471) 5781.5,5461.5 5781.5,5096.53 6262,4616.03 6262,4275 v1(6248,4261)
synclock_LVCMOS33: B13.1 U1.J12 | length 4119
  Top Layer w8: v1(6681.2,3867) 6700.79,3847.41 U1.J12@6700.97,3847.41
  Signal Layer 3 w4: v1(6681.2,3867) 6701,3886.8 6701,4396 7013,4708 7770,4708 8125.57,5063.57 B13.1@8125.57,6916.43
syntrigger_LVCMOS33: B14.1 U1.L11 | length 4203.1
  Top Layer w8: U1.L11@6622.23,3886.78 v1(6642,3867)
  Signal Layer 3 w4: v1(6642,3867) 6662,3887 6662,4435 6959,4732 7749,4732 8003,4986 8003,6365 7763.57,6604.43 B14.1@7763.57,6916.43
TCK1_LVCMOS33: J1.B5 U1.P26 | length 5809.1
  Top Layer w8: v1(6485,3316) U1.P26@6504.12,3296.88
  Top Layer w10: U1.P26@6504.12,3296.23 U1.P26@6504.12,3296.88
  Signal Layer 4 w4: J1.B5@1955,1265 1955,1603 3152,2800 6317,2800 6465,2948 6465,3296 v1(6485,3316)
TCK2_LVCMOS33: J1.E5 U1.P28 | length 3999
  Top Layer w8: v1@6485,3236.61 U1.P28@6504.12,3217.49
  Top Layer w10: v1@6485,3236.61 v1(6485,3237)
  Signal Layer 1 w4: J1.E5@3605,1265 3605,1465 4935,2795 6312,2795 6465,2948 6465,3217 v1(6485,3237)
TCK3_LVCMOS33: J1.H5 U1.R24 | length 6281.3
  Top Layer w8: U1.R24@6464.75,3374.97 6465.97,3374.97 v1(6485,3394)
  Signal Layer 4 w4: J1.H5@2005,905 2005,1067 1954,1118 1954,1189 2005,1240 2005,1574 3194,2763 6353.29,2763 6503.86,2913.57 6503.86,3375.14 v1(6485,3394)
TCK4_LVCMOS33: J1.K5 U1.V27 | length 4605.5
  Top Layer w8: v1(6327,3275.87) 6327.63,3275.87 U1.V27@6346.64,3256.86
  Signal Layer 1 w4: J1.K5@3655,905 3655,1074 3604,1125 3604,1189 3655,1240 3655,1450 4598,2393 v1(6359,2393)
  Signal Layer 2 w4: v1(6327,3275.87) 6347,3255.87 6347,2405 v1(6359,2393)
TCK5_LVCMOS33: J2.B5 U1.U30 | length 2207.6
  Top Layer w4: J2.B5@5580,1265 5580,2063 6386.01,2869.01 U1.U30@6386.01,3138.75
TCK6_LVCMOS33: J2.E5 U1.M30 | length 2141.8
  Top Layer w4: U1.M30@6582.86,3138.75 6582.86,2835.14 7230,2188 J2.E5@7230,1265
TCK7_LVCMOS33: J2.H5 U1.R29 | length 2618.9
  Top Layer w4: J2.H5@5630,905 5630,1071 5680,1121 5680,1190 5728,1238 5728,1998 6445.2,2715.2 6445.2,3158.57 U1.R29@6464.75,3178.12
TCK8_LVCMOS33: J2.K5 U1.K29 | length 2627.5
  Top Layer w4: U1.K29@6661.6,3178.12 6642,3158.52 6642,2985 7379,2248 7379,1238 7330,1189 7330,1108 7280,1058 J2.K5@7280,905
TCK9_LVCMOS33: J3.B5 U1.J27 | length 4035.1
  Top Layer w8: v1@6681.83,3276 U1.J27@6700.97,3256.86
  Top Layer w10: v1(6681,3276) v1@6681.83,3276
  Signal Layer 1 w4: v1(6697,2393) 8320,2393 9205,1508 J3.B5@9205,1265
  Signal Layer 2 w4: v1(6681,3276) 6697,3260 v1(6697,2393)
TCK10_LVCMOS33: J3.E5 U1.N26 | length 5747.3
  Top Layer w10: v1(6524,3316) 6524,3315.72 U1.N26@6543.49,3296.23
  Signal Layer 4 w4: v1(6524,3316) 6544,3296 6544,2943 6763,2724 9963,2724 10855,1832 J3.E5@10855,1265
TCK11_LVCMOS33: J3.H5 U1.M28 | length 4281.4
  Top Layer w8: v1(6563,3237) 6582.51,3217.49 U1.M28@6582.86,3217.49
  Signal Layer 1 w4: v1(6563,3237) 6544,3218 6544,2938 6711,2771 7990,2771 9255,1506 9255,1239 9205,1189 9205,1126 9255,1076 J3.H5@9255,905
TCK12_LVCMOS33: J3.K5 U1.M24 | length 6254.6
  Top Layer w8: v1(6563.46,3394) 6563.83,3394 U1.M24@6582.86,3374.97
  Signal Layer 4 w4: v1(6563.46,3394) 6583,3374.46 6583,2974 6786,2771 10027,2771 10905,1893 10905,1240 10855,1190 10855,1115 10905,1065 J3.K5@10905,905
TDI1_LVCMOS33: J1.B1 U1.T25 | length 6078.6
  Top Layer w8: v1(6406,3355) U1.T25@6425.38,3335.6
  Signal Layer 3 w4: v1(6406,3355) 6425,3336 6425,3072 6484,3013 v1(6484,2149)
  Signal Layer 4 w4: J1.B1@2155,1265 2155,1466 2675,1986 6321,1986 v1(6484,2149)
TDI2_LVCMOS33: J1.E1 U1.P27 | length 4184.9
  Top Layer w8: v1(6485,3276) U1.P27@6504.12,3256.86
  Signal Layer 1 w4: J1.E1@3805,1265 3805,1409 4633,2237 6347.86,2237 v1(6503.86,2393)
  Signal Layer 2 w4: v1(6485,3276) 6465,3256 6465,2797 6503.86,2758.14 v1(6503.86,2393)
TDI3_LVCMOS33: J1.H1 U1.V26 | length 6237.1
  Top Layer w8: v1(6327.05,3316) 6327.05,3315.82 U1.V26@6346.64,3296.23
  Signal Layer 4 w4: J1.H1@1805,905 1805,1088 1749,1144 1749,1207 1803,1261 1803,1681 3029,2907 6208,2907 6347,3046 6347,3296.05 v1(6327.05,3316)
TDI4_LVCMOS33: J1.K1 U1.U28 | length 4412.8
  Top Layer w8: v1(6367,3237) 6367,3236.5 U1.U28@6386.01,3217.49
  Signal Layer 1 w4: J1.K1@3455,905 3455,1084 3401,1138 3401,1207 3454,1260 3454,1523 4832,2901 6202,2901 6347,3046 6347,3217 v1(6367,3237)
TDI5_LVCMOS33: J2.B1 U1.R30 | length 2157.4
  Top Layer w4: J2.B1@5780,1265 5780,1976.8 6464.75,2661.55 U1.R30@6464.75,3138.75
TDI6_LVCMOS33: J2.E1 U1.K30 | length 2192
  Top Layer w4: U1.K30@6661.6,3138.75 6661.6,3038.4 7430,2270 J2.E1@7430,1265
TDI7_LVCMOS33: J2.H1 U1.V29 | length 2669.7
  Top Layer w4: J2.H1@5430,905 5430,1055 5480,1105 5480,1191 5530,1241 5530,2088 6367,2925 6367,3157.76 U1.V29@6346.64,3178.12
TDI8_LVCMOS33: J2.K1 U1.N29 | length 2578.2
  Top Layer w4: U1.N29@6543.49,3178.12 6564.27,3157.34 6564.27,2780.73 7180,2165 7180,1240 7130,1190 7130,1105 7080,1055 J2.K1@7080,905
TDI9_LVCMOS33: J3.B1 U1.J28 | length 3858.8
  Top Layer w8: v1(6681,3237) U1.J28@6700.51,3217.49
  Top Layer w10: U1.J28@6700.51,3217.49 U1.J28@6700.97,3217.49
  Signal Layer 1 w4: v1(6681,3237) 6662,3218 6662,3039 6796,2905 8016,2905 9405,1516 J3.B1@9405,1265
TDI10_LVCMOS33: J3.E1 U1.J26 | length 5833.4
  Top Layer w8: v1@6681.2,3316 U1.J26@6700.97,3296.23
  Top Layer w10: v1(6681,3316) v1@6681.2,3316
  Signal Layer 4 w4: v1(6681,3316) 6697,3300 6697,3075 6867,2905 10183,2905 11055,2033 J3.E1@11055,1265
TDI11_LVCMOS33: J3.H1 U1.N27 | length 4424.1
  Top Layer w8: v1(6523.9,3275.98) 6524.37,3275.98 U1.N27@6543.49,3256.86
  Signal Layer 1 w4: v1(6552.14,2393) 6706.14,2239 8298,2239 9054,1483 9054,1257 9000,1203 9000,1142 9055,1087 J3.H1@9055,905
  Signal Layer 2 w4: v1(6523.9,3275.98) 6543,3256.87 6543,2402.14 v1(6552.14,2393)
TDI12_LVCMOS33: J3.K1 U1.N25 | length 6407.2
  Top Layer w8: v1(6523.87,3354.61) 6524.48,3354.61 U1.N25@6543.49,3335.6
  Signal Layer 3 w4: v1(6523.87,3354.61) 6543,3335.47 6543,2737 6572,2708 v1(6572,2149)
  Signal Layer 4 w4: v1(6572,2149) 6725,1996 10397,1996 10705,1688 10705,1263 10648,1206 10648,1143 10705,1086 J3.K1@10705,905
TDO1_LVCMOS33: J1.B7 U1.T26 | length 5820.2
  Top Layer w8: v1@6406,3315.61 U1.T26@6425.38,3296.23
  Top Layer w10: v1@6406,3315.61 v1(6406,3316)
  Signal Layer 4 w4: J1.B7@1855,1265 1855,1655 3072,2872 6241,2872 6386,3017 6386,3296 v1(6406,3316)
TDO2_LVCMOS33: J1.E7 U1.T28 | length 4003.7
  Top Layer w8: v1@6406,3236.87 U1.T28@6425.38,3217.49
  Top Layer w10: v1@6406,3236.87 v1(6406,3237)
  Signal Layer 1 w4: J1.E7@3505,1265 3505,1506 4871,2872 6241,2872 6386,3017 6386,3217 v1(6406,3237)
TDO3_LVCMOS33: J1.H7 U1.U25 | length 6497.7
  Top Layer w8: v1(6367,3355) 6386.01,3335.99 U1.U25@6386.01,3335.6
  Signal Layer 3 w4: v1(6367,3355) 6386,3336 6386,3058 6433.5,3010.5 v1(6433.5,2149)
  Signal Layer 4 w4: J1.H7@2105,905 2105,1072 2054,1123 2054,1191 2104,1241 2104,1503 2668,2067 6351.5,2067 v1(6433.5,2149)
TDO4_LVCMOS33: J1.K7 U1.T27 | length 4592.4
  Top Layer w8: v1(6405.75,3276) 6406.24,3276 U1.T27@6425.38,3256.86
  Signal Layer 1 w4: J1.K7@3755,905 3755,1079 3705,1129 3705,1188 3754,1237 3754,1421 4623,2290 6352.57,2290 v1(6455.57,2393)
  Signal Layer 2 w4: v1(6405.75,3276) 6425,3256.75 6425,2762 6455.57,2731.43 v1(6455.57,2393)
TDO5_LVCMOS33: J2.B7 U1.V30 | length 2232.7
  Top Layer w4: J2.B7@5480,1265 5480,2111 6346.64,2977.64 U1.V30@6346.64,3138.75
TDO6_LVCMOS33: J2.E7 U1.N30 | length 2116.7
  Top Layer w4: U1.N30@6543.49,3138.75 6543.49,2736.51 7130,2150 J2.E7@7130,1265
TDO7_LVCMOS33: J2.H7 U1.P29 | length 2593.8
  Top Layer w4: J2.H7@5730,905 5730,1071 5831,1172 5831,1953 6484,2606 6484,3158 U1.P29@6504.12,3178.12
TDO8_LVCMOS33: J2.K7 U1.J29 | length 2654.6
  Top Layer w4: U1.J29@6700.97,3178.12 6682,3159.15 6682,3095 7482,2295 7482,1159 7380,1057 J2.K7@7380,905
TDO9_LVCMOS33: J3.B7 U1.M27 | length 4037.5
  Top Layer w8: v1@6563.72,3276 U1.M27@6582.86,3256.86
  Top Layer w10: v1(6563,3276) v1@6563.72,3276
  Signal Layer 1 w4: v1(6600.43,2393) 6702.43,2291 8317,2291 9105,1503 J3.B7@9105,1265
  Signal Layer 2 w4: v1(6563,3276) 6583,3256 6583,2766 6600.43,2748.57 v1(6600.43,2393)
TDO10_LVCMOS33: J3.E7 U1.M25 | length 6035.2
  Top Layer w8: v1@6563.46,3355 U1.M25@6582.86,3335.6
  Top Layer w10: v1(6563,3355) v1@6563.46,3355
  Signal Layer 3 w4: v1(6563,3355) 6583,3335 6583,3041 6623,3001 v1(6623,2149)
  Signal Layer 4 w4: v1(6623,2149) 6705,2067 10428,2067 10755,1740 J3.E7@10755,1265
TDO11_LVCMOS33: J3.H7 U1.K28 | length 4266.2
  Top Layer w8: v1(6642,3236.87) 6642.22,3236.87 U1.K28@6661.6,3217.49
  Signal Layer 1 w4: v1(6642,3236.87) 6622,3216.87 6622,3005 6767,2860 8006,2860 9355,1511 9355,1239 9306,1190 9306,1125 9355,1076 J3.H7@9355,905
TDO12_LVCMOS33: J3.K7 U1.K26 | length 6224
  Top Layer w8: v1(6642,3315.93) 6661.6,3296.33 U1.K26@6661.6,3296.23
  Signal Layer 4 w4: v1(6642,3315.93) 6662,3295.93 6662,3038 6840,2860 10146,2860 11005,2001 11005,1240 10955,1190 10955,1118 11005,1068 J3.K7@11005,905
TMS1_LVCMOS33: J1.B3 U1.V25 | length 6113.9
  Top Layer w8: v1(6327,3355) U1.V25@6346.4,3335.6
  Top Layer w10: U1.V25@6346.4,3335.6 U1.V25@6346.64,3335.6
  Signal Layer 3 w4: v1(6327,3355) 6347,3335 6347,3044 6383,3008 v1(6383,2149)
  Signal Layer 4 w4: J1.B3@2055,1265 2055,1543 2661,2149 v1(6383,2149)
TMS2_LVCMOS33: J1.E3 U1.U27 | length 4195.8
  Top Layer w8: v1@6367,3275.87 U1.U27@6386.01,3256.86
  Top Layer w10: v1@6367,3275.87 v1(6367,3276)
  Signal Layer 1 w4: J1.E3@3705,1265 3705,1435 4610,2340 6354.29,2340 v1(6407.29,2393)
  Signal Layer 2 w4: v1(6367,3276) 6386,3257 6386,2720 6407.29,2698.71 v1(6407.29,2393)
TMS3_LVCMOS33: J1.H3 U1.R26 | length 6215.5
  Top Layer w8: v1(6445.61,3316) 6464.75,3296.86 U1.R26@6464.75,3296.23
  Signal Layer 4 w4: J1.H3@1905,905 1905,1076 1855,1126 1855,1191 1905,1241 1905,1628 3114,2837 6280,2837 6425,2982 6425,3295.39 v1(6445.61,3316)
TMS4_LVCMOS33: J1.K3 U1.R28 | length 4402.4
  Top Layer w8: v1(6445,3236.87) 6445.37,3236.87 U1.R28@6464.75,3217.49
  Signal Layer 1 w4: J1.K3@3555,905 3555,1082 3505,1132 3505,1191 3556,1242 3556,1486 4901,2831 6274,2831 6425,2982 6425,3216.87 v1(6445,3236.87)
TMS5_LVCMOS33: J2.B3 U1.T30 | length 2182.5
  Top Layer w4: J2.B3@5680,1265 5680,2016 6425.38,2761.38 U1.T30@6425.38,3138.75
TMS6_LVCMOS33: J2.E3 U1.L30 | length 2166.9
  Top Layer w4: U1.L30@6622.23,3138.75 6622.23,2934.77 7330,2227 J2.E3@7330,1265
TMS7_LVCMOS33: J2.H3 U1.U29 | length 2644.5
  Top Layer w4: J2.H3@5530,905 5530,1071 5580,1121 5580,1189 5630.39,1239.39 5630.39,2038.39 6406.31,2814.31 6406.31,3157.82 U1.U29@6386.01,3178.12
TMS8_LVCMOS33: J2.K3 U1.M29 | length 2603.3
  Top Layer w4: U1.M29@6582.86,3178.12 6603,3157.98 6603,2879 7280,2202 7280,1240 7229,1189 7229,1105 7180,1056 J2.K3@7180,905
TMS9_LVCMOS33: J3.B3 U1.L28 | length 3870.8
  Top Layer w8: v1(6602,3237) U1.L28@6621.51,3217.49
  Top Layer w10: U1.L28@6621.51,3217.49 U1.L28@6622.23,3217.49
  Signal Layer 1 w4: v1(6602,3237) 6583,3218 6583,2974 6742,2815 7997,2815 9305,1507 J3.B3@9305,1265
TMS10_LVCMOS33: J3.E3 U1.L26 | length 5792.7
  Top Layer w8: v1@6602.46,3316 U1.L26@6622.23,3296.23
  Top Layer w10: v1(6602,3316) v1@6602.46,3316
  Signal Layer 4 w4: v1(6602,3316) 6622,3296 6622,3007 6814,2815 10075,2815 10955,1935 J3.E3@10955,1265
TMS11_LVCMOS33: J3.H3 U1.L27 | length 4444
  Top Layer w8: v1(6602,3275.98) 6621.12,3256.86 U1.L27@6622.23,3256.86
  Signal Layer 1 w4: v1(6648.71,2393) 6704.71,2337 8321,2337 9154,1504 9154,1239 9105,1190 9105,1124 9155,1074 J3.H3@9155,905
  Signal Layer 2 w4: v1(6602,3275.98) 6622,3255.98 6622,2796 6648.71,2769.29 v1(6648.71,2393)
TMS12_LVCMOS33: J3.K3 U1.L25 | length 6466.4
  Top Layer w8: v1(6602,3355) 6602.83,3355 U1.L25@6622.23,3335.6
  Signal Layer 3 w4: v1(6602,3355) 6622,3335 6622,3078 6674,3026 v1(6674,2149)
  Signal Layer 4 w4: v1(6674,2149) 10438,2149 10805,1782 10805,1239 10754,1188 10754,1115 10805,1064 J3.K3@10805,905
UART_RX_LVCMOS33: P2.3 U1.K11 | length 4466.5
  Top Layer w8: v1(6642,3906) 6642.38,3906 U1.K11@6661.6,3886.78
  Signal Layer 2 w4: v1(6642,3906) 6622,3926 6622,4387 6746,4511 7574,4511 8620,5557 P2.3@8620,7024
UART_TX_LVCMOS33: P2.2 U1.J11 | length 4499.5
  Top Layer w8: v1(6681,3906) 6681.75,3906 U1.J11@6700.97,3886.78
  Signal Layer 2 w4: v1(6681,3906) 6662,3925 6662,4381 6756,4475 7598,4475 8720,5597 P2.2@8720,7024
pads on no net: J1.MH17 J1.MH18 J2.MH17 J2.MH18 J3.MH17 J3.MH18 J4. J5. U1.A3 U1.A4 U1.A7 U1.A8 U1.AA8 U1.AA10 U1.AA11 U1.AA12 U1.AA13 U1.AA15 U1.AA16 U1.AA17 U1.AA18 U1.AB7 U1.AB8 U1.AB9 U1.AB10 U1.AB12 U1.AB13 U1.AB14 U1.AB15 U1.AB17 U1.AB18 U1.AB19 U1.AC4 U1.AC5 U1.AC6 U1.AC7 U1.AC9 U1.AC10 U1.AC11 U1.AC12 U1.AC14 U1.AC15 U1.AC16 U1.AC17 U1.AC19 U1.AD3 U1.AD4 U1.AD6 U1.AD7 U1.AD8 U1.AD9 U1.AD11 U1.AD12 U1.AD13 U1.AD14 U1.AD16 U1.AD17 U1.AD18 U1.AD19 U1.AE3 U1.AE4 U1.AE5 U1.AE6 U1.AE8 U1.AE9 U1.AE10 U1.AE11 U1.AE13 U1.AE14 U1.AE15 U1.AE16 U1.AE18 U1.AE19 U1.AE20 U1.AE26 U1.AF3 U1.AF5 U1.AF6 U1.AF7 U1.AF8 U1.AF10 U1.AF11 U1.AF12 U1.AF13 U1.AF15 U1.AF16 U1.AF17 U1.AF18 U1.AG3 U1.AG4 U1.AG5 U1.AG7 U1.AG8 U1.AG9 U1.AG10 U1.AG12 U1.AG13 U1.AG14 U1.AG15 U1.AG17 U1.AG18 U1.AG19 U1.AH4 U1.AH5 U1.AH6 U1.AH7 U1.AH9 U1.AH10 U1.AH11 U1.AH12 U1.AH14 U1.AH15 U1.AH16 U1.AH17 U1.AH19 U1.AJ3 U1.AJ4 U1.AJ6 U1.AJ7 U1.AJ8 U1.AJ9 U1.AJ11 U1.AJ12 U1.AJ13 U1.AJ14 U1.AJ16 U1.AJ17 U1.AJ18 U1.AJ19 U1.AK9 U1.AK10 U1.AK11 U1.AK13 U1.AK14 U1.AK15 U1.AK16 U1.AK18 U1.AK19 U1.B1 U1.B2 U1.B5 U1.B6 U1.C3 U1.C4 U1.C7 U1.C8 U1.D1 U1.D2 U1.D5 U1.D6 U1.E3 U1.E4 U1.E7 U1.E8 U1.E15 U1.E18 U1.F1 U1.F2 U1.F5 U1.F6 U1.F13 U1.F15 U1.F23 U1.G3 U1.G4 U1.G7 U1.G8 U1.G15 U1.G19 U1.G25 U1.H1 U1.H2 U1.H5 U1.H6 U1.H29 U1.J3 U1.J4 U1.J7 U1.J8 U1.J14 U1.J21 U1.J22 U1.J23 U1.J24 U1.K1 U1.K2 U1.K5 U1.K6 U1.K13 U1.K14 U1.K15 U1.K21 U1.K23 U1.K24 U1.K25 U1.L3 U1.L4 U1.L7 U1.L8 U1.L12 U1.L13 U1.L15 U1.L20 U1.L21 U1.L22 U1.L23 U1.M1 U1.M2 U1.M5 U1.M6 U1.M19 U1.M20 U1.M22 U1.M23 U1.N3 U1.N4 U1.N7 U1.N8 U1.N19 U1.N20 U1.N21 U1.N22 U1.N24 U1.P1 U1.P2 U1.P5 U1.P6 U1.P19 U1.P21 U1.P22 U1.P23 U1.R3 U1.R4 U1.R19 U1.R23 U1.T1 U1.T2 U1.T5 U1.T6 U1.T20 U1.T21 U1.T22 U1.T23 U1.U20 U1.U22 U1.U23 U1.U24 U1.V1 U1.V2 U1.V5 U1.V6 U1.V19 U1.V20 U1.V21 U1.V22 U1.V24 U1.W19 U1.W21 U1.W22 U1.W23 U1.W24 U1.W26 U1.Y5 U1.Y6 U1.Y10 U1.Y11 U1.Y13 U1.Y14 U1.Y15 U1.Y16 U1.Y18 U1.Y19 U1.Y20 U1.Y25 U2.3 U2.4 U2.5 U2.6 U2.11 U2.12 U2.13 U2.14 U3.2 U4.1 U5.C2 U5.C3 U5.C7 U5.F2 U5.H7 U5.J2 U5.J3 U5.L7 U6.C2 U6.C3 U6.C7 U6.F2 U6.H7 U6.J2 U6.J3 U6.L7 U7.A8 U7.A9 U7.A11 U7.A12 U7.B14 U7.B15 U7.B17 U7.B18 U7.B20 U7.B21 U7.C3 U7.C4 U7.C6 U7.C7 U7.D13 U7.D14 U7.D15 U7.D16 U7.D17 U7.D19 U7.D25 U7.D26 U7.D27 U7.D28
copper on no net: | length 1.1
  Top Layer w8: 6622.23,3807.77 6622.23,3808.04 ; 6661.6,3768.5 6661.6,3768.67 ; 6661.6,3807.48 6661.6,3808.04 ; 6819,3808.04 6819.08,3808.04

## Polygon pours and split planes (outlines as drawn)
GND on Internal Plane 1 (split plane): 12588.34,403.78 403.78,403.78 403.78,7076.53 12588.34,7076.53
+3.3Vd on Internal Plane 2 (split plane): 12588.34,403.78 403.78,403.78 403.78,7076.53 12588.34,7076.53
+2.5Vd on Internal Plane 3 (split plane): 12588.34,403.78 403.78,403.78 403.78,7076.53 12588.34,7076.53
NetC17_2 on Internal Plane 3 (split plane): 7113.93,4019.07 6322.07,4019.07 6322.07,4426.93 7113.93,4426.93
+1.8Vd on Internal Plane 4 (split plane): 12588.34,403.78 403.78,403.78 403.78,7076.53 12588.34,7076.53
PGND on Internal Plane 5 (split plane): 12588.34,403.78 403.78,403.78 403.78,1410.93 12588.34,1410.93
+1.0Vfpga on Internal Plane 5 (split plane): 7346.93,5233 7347.22,5230.06 7348.07,5227.23 7349.47,5224.63 7351.34,5222.34 7414.34,5159.34 7416.63,5157.47 7419.23,5156.07 7422.06,5155.22 7425,5154.93 7556.76,5154.93 7567.93,5143.76 7567.93,4649.24 6664.34,3745.66 6662.47,3743.37 6661.07,3740.77 6660.22,3737.94 6659.93,3735 6659.93,3644.24 6574.76,3559.07 6359.24,3559.07 6207.07,3711.24 6207.07,3884 6207.07,4179.76 6671.66,4644.34 7305.24,5277.93 7346.93,5277.93
GND on Internal Plane 5 (split plane): 7346.93,5308.07 7299,5308.07 7296.06,5307.78 7293.23,5306.93 7290.63,5305.53 7288.34,5303.66 6650.34,4665.66 6181.34,4196.66 6179.47,4194.37 6178.07,4191.77 6177.22,4188.94 6176.93,4186 6176.93,3884 6176.93,3705 6177.22,3702.06 6178.07,3699.23 6179.47,3696.63 6181.34,3694.34 6342.34,3533.34 6344.63,3531.47 6347.23,3530.07 6350.06,3529.22 6353,3528.93 6581,3528.93 6583.94,3529.22 6586.77,3530.07 6589.37,3531.47 6591.66,3533.34 6685.66,3627.34 6687.53,3629.63 6688.93,3632.23 6689.78,3635.06 6690.07,3638 6690.07,3728.76 7582,4620.68 8971.34,3231.34 8973.63,3229.47 8976.23,3228.07 8979.06,3227.22 8982,3226.93 12588.34,3226.93 12588.34,1441.07 403.78,1441.07 403.78,7076.53 7346.93,7076.53
+12V on Internal Plane 5 (split plane): 12588.34,3257.07 8988.24,3257.07 7598.07,4647.24 7598.07,4829.93 7723.77,4829.93 7726.71,4830.22 7729.54,4831.07 7732.14,4832.47 7734.43,4834.34 7861.66,4961.57 7863.53,4963.86 7864.93,4966.46 7865.78,4969.29 7866.07,4972.23 7866.07,5170 7865.78,5172.94 7864.93,5175.77 7863.53,5178.37 7861.66,5180.66 7859.37,5182.53 7856.77,5183.93 7853.94,5184.78 7851,5185.07 7431.24,5185.07 7377.07,5239.24 7377.07,5293 7377.07,7076.53 12588.34,7076.53
+1.0Vmgt on Internal Plane 5 (split plane): 7704.93,5059.24 7612.76,4967.07 7598.07,4967.07 7598.07,5150 7597.78,5152.94 7597.18,5154.93 7704.93,5154.93
+1.2Vmgt on Internal Plane 5 (split plane): 7835.93,4978.48 7717.52,4860.07 7598.07,4860.07 7598.07,4936.93 7619,4936.93 7621.94,4937.22 7624.77,4938.07 7627.37,4939.47 7629.66,4941.34 7730.66,5042.34 7732.53,5044.63 7733.93,5047.23 7734.78,5050.06 7735.07,5053 7735.07,5154.93 7835.93,5154.93
GND on Internal Plane 6 (split plane): 12588.34,403.78 403.78,403.78 403.78,7076.53 12588.34,7076.53

## Other copper
Internal Plane 3 (plane layer: these items are gaps in the copper):
  lines w30: 6307,4008 6311,4004 7129,4004 7129,4442 6307,4442 6307,4008
Internal Plane 5 (plane layer: these items are gaps in the copper):
  lines w30: 386,1426 12605.44,1426 ; 7362,7096 7362,5293 ; 7585,4845 7723.77,4845 7851,4972.23 7851,5170 7720,5170 ; 7585,4952 7619,4952 7720,5053 7720,5170 ; 12607,3242 8982,3242 7583,4641 7583,4643 ; 7362,5293 7299,5293 6661,4655 6192,4186 6192,3884 6192,3705 6353,3544 6581,3544 6675,3638 6675,3735 7583,4643 ; 7362,5293 7362,5233 7425,5170 7563,5170 ; 7563,5170 7720,5170 ; 7563,5170 7583,5150 7583,4643

## Silkscreen, mask and mechanical layers (free items; w line width, h text height)
Top Overlay:
  lines w20: 393.7,393.7 393.7,7086.61 12598.43,7086.61 12598.43,393.7 393.7,393.7
  text "GND" at 8554,6795 h60 r90
  text "GND" at 9591,6785 h60 r90
  text "key" at 11433,6711 h60
  text "FPGA" at 7272,6695 h60
  text "+3.3V" at 8853,6677 h60 r90
  text "SFP1" at 6057,6676 h60
  text "+3.3V" at 9690,6673.85 h60 r90
  text "SFP2" at 5071,6667 h60
  text "Power" at 10882,6639 h60
  text "synclock" at 7975,6587 h60
  text "syntrigger" at 7386,6583 h60
  text "12Vin" at 11995,6571 h60
  text "UART_RX" at 8644,6551 h60 r90
  text "UART_TX" at 8750,6549 h60 r90
  text "JTAG_TMS" at 9189,6492 h60 r90
  text "JTAG_TDI" at 9288,6491 h60 r90
  text "JTAG_TDO" at 9384,6489 h60 r90
  text "JTAG_TCK" at 9490,6486 h60 r90
  text "+2.5V" at 10652,3430 h60
  text "+3.3V" at 9907,3429 h60
  text "+1.8V" at 10317,3144 h60
  text "JUNO RPC CDC_WR v1" at 692,2127 h60
  text "jxs 2025-6-3" at 686,1978 h60
  text "PGND" at 678,1311 h60
  text "PGND" at 12097,1300 h60
  text "ch5" at 854,985 h60
  text "ch2" at 658,984 h60
  text "ch1" at 465,981 h60
  text "ch10" at 12298,951 h60
  text "ch9" at 12089,950 h60
  text "ch6" at 11888,947 h60
  text "ch7" at 861,813 h60
  text "ch4" at 667,811 h60
  text "ch3" at 462,809 h60
  text "ch8" at 11885,775 h60
  text "ch11" at 12083,775 h60
  text "ch12" at 12297,775 h60

## Text inside footprints (layer, text, board x,y; h text height)
U7: Top Overlay "WRB" at 10067,5733 h60